# Allegro board core.brd
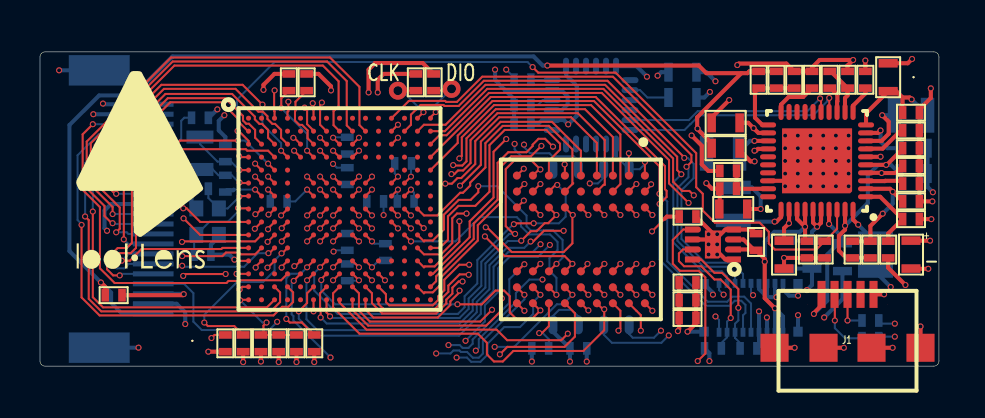
[diagram p0: board, top side]
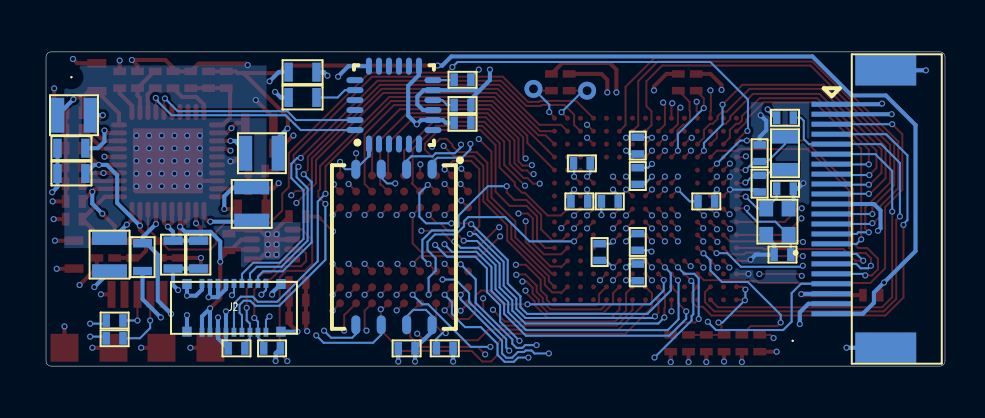
[diagram p1: board, bottom side, seen from below]

Outline 44.96 x 15.75 mm; copper layers: TOP, GND, SIG1, SIG2, POWER, BOTTOM. Coordinates in mm from the lower left corner of the outline.
Outline path: 0,15.49 arc(0.07,15.67) 0.25,15.75 44.7,15.75 arc(44.88,15.67) 44.96,15.49 44.96,0.25 arc(44.88,0.07) 44.7,0 0.25,0 arc(0.07,0.07) 0,0.25 0,15.49

## Design rules (mm)
net group 2.5V: nets N93770 N94238
net group N108220: nets N108220 N209430
net group N108232: nets N108232 N209434
net group N209616: nets N76608 N209616
net group OSC32-IN: nets OSC32-IN OSC32-OUT
net group 5V: nets N92103
net group CONNECT: nets N209454 N209458 N209478 N209482 N209502 N209506 N209628 N209640
net group POWER: nets N87122
net group RAM_CTL: nets N192988 N192990 N192992 N192994 N192996 N192998 N193000 N193002 N193004

## Placement (name value [footprint] x y rotation side)
C1  1uF  [0402]  12.83 1.14 90 top
C2  0.1uF  [0402]  11.94 1.14 90 top
C3  20pF  [0402]  8.13 5.59 0 bottom
C4  20pF  [0402]  8 8.89 180 bottom
C5  12pF  [0402]  9.27 9.14 90 bottom
C6  12pF  [0402]  9.27 10.67 90 bottom
C7  0.1uF  [0402]  18.16 10.16 0 bottom
C8  0.1uF  [0402]  17.27 5.71 270 bottom
C9  0.1uF  [0402]  18.29 8.26 0 bottom
C10  0.1uF  [0402]  15.37 11.05 90 bottom
C11  0.1uF  [0402]  15.37 4.7 270 bottom
C12  0.1uF  [0402]  11.94 8.26 180 bottom
C13  0.1uF  [0402]  15.37 6.22 270 bottom
C14  0.1uF  [0402]  16.76 8.26 0 bottom
C15  4.7uF  [0603]  32.13 13.46 0 bottom
C16  0.1uF  [0402]  24.13 12.19 0 bottom
C17  4.7uF  [0603]  32.13 14.73 0 bottom
C18  0.1uF  [0402]  24.13 13.08 0 bottom
C19  4.7uF  [0603]  38.61 5.59 270 bottom
C20  4.7pF  [0402]  40.64 5.84 270 top
C21  4.7uF  [0603]  43.69 9.65 180 bottom
C22  4.7uF  [0603]  37.21 5.59 270 top
C23  4.7uF  [0603]  34.67 7.87 0 top
C24  4.7uF  [0603]  34.29 12.19 180 top
C25  0.1uF  [0402]  38.61 14.35 270 top
C26  33pF  [0402]  36.83 14.35 90 top
C27  4.7uF  [0603]  34.29 10.92 180 top
C28  1uF  [0402]  43.56 10.92 180 top
C29  4.7uF  [0603]  43.69 10.92 0 bottom
C30  4.7uF  [0603]  42.42 14.48 270 top
C31  2.2uF  [0603]  40.13 5.46 270 bottom
C32  4.7uF  [0603]  37.34 5.59 270 bottom
C33  1uF  [0402]  38.35 5.84 90 top
C34  0.1uF  [0402]  39.24 5.84 270 top
C35  1uF  [0402]  43.56 9.14 0 top
C36  0.1uF  [0402]  35.81 6.22 90 top
C37  0.1uF  [0402]  42.42 5.84 90 top
C38  0.1uF  [0402]  43.56 11.81 180 top
C39  0.1uF  [0402]  26.92 0.89 180 bottom
C40  0.1uF  [0402]  32.38 7.49 180 top
C41  0.1uF  [0402]  32.38 3.3 180 top
C42  0.1uF  [0402]  32.38 2.41 180 top
C43  0.1uF  [0402]  32.38 4.19 180 top
C46  0.1uF  [0402]  15.37 9.53 90 bottom
D1  LED  [0603]  43.56 5.59 90 top
F1  -  [FPC-22]  5.66 13.12 270 bottom
J1  -  [MICRO-USB]  40.39 0.92 0 top
J2  CONN RECT 11x2  [MOLEX-BTB-18P-B]  35.56 2.92 180 bottom
L1  100nH  [0402]  11.05 1.14 90 top
L2  2.2uH  [0806]  41.78 5.59 270 bottom
L3  2.2uH  [0806]  34.67 8.13 90 bottom
L4  2.2uH  [0806]  34.16 10.67 180 bottom
L5  2.2uH  [0806]  43.56 12.57 0 bottom
M1  MTG  [MTG-100]  7.62 1.27 0 top
M2  MTG  [MTG-100]  43.69 14.48 0 top
NOREF  -  []  43.69 14.48 0 top
NOREF#2  -  []  0 0.64 0 top
NOREF#3  -  []  36.94 -1.23 0 top
NOREF#4  -  []  0 1.04 0 top
NOREF#5  -  []  1.28 4.29 0 top
NOREF#6  -  []  0.16 0.12 90 top
NOREF#7  -  []  0.3 0 90 top
NOREF#8  -  []  7.62 0 90 top
NOREF#9  -  []  36.12 0 90 top
NOREF#10  -  []  43.69 14.48 90 top
NOREF#11  -  []  35.56 2.92 0 top
O1  25M  [OSC-2016]  8.38 7.24 0 bottom
O2  32.768K  [OSC-2012]  8 10.67 90 bottom
R1  10K  [0402]  35.43 0.89 180 bottom
R2  10K  [0402]  33.66 0.89 0 bottom
R3  10K  [0402]  12.45 14.22 270 top
R4  10K  [0402]  13.72 1.14 90 top
R5  10K  [0402]  13.34 14.22 270 top
R6  10K  [0402]  9.27 1.14 270 top
R7  10K  [0402]  10.16 1.14 90 top
R8  10K  [0402]  19.68 14.22 90 top
R9  10K  [0402]  18.8 14.22 90 top
R10  1K  [0402]  24.13 14.35 180 bottom
R11  160K  [0402]  41.53 5.84 270 top
R12  30K  [0402]  43.56 8.26 0 top
R13  470K  [0402]  34.42 9.78 180 top
R14  150K  [0402]  34.42 8.89 180 top
R15  470K  [0402]  35.94 14.35 90 top
R16  220K  [0402]  37.72 14.35 90 top
R17  22  [0402]  41.53 1.4 0 bottom
R18  22  [0402]  41.53 2.29 0 bottom
R19  10  [0402]  43.56 10.03 180 top
R20  220K  [0402]  43.56 12.7 0 top
R22  1.5K  [0402]  41.27 14.35 270 top
R23  100K  [0402]  40.39 14.35 90 top
R24  100K  [0402]  39.5 14.35 90 top
R25  10K  [0402]  43.56 7.37 0 top
R26  10K  [0402]  8 12.45 0 bottom
R27  10K  [0402]  3.68 3.56 180 top
R28  10K  [0402]  25.02 0.89 0 bottom
U1  STM32F429  [STM32F429-UFBGA176]  14.98 7.87 0 top
U2  MPU6050  [MPU6050-QFN]  27.56 13.08 90 bottom
U3  RT5002  [RT5002-QFN40]  38.86 10.29 180 top
U4  MAX17048  [MAX17048-TDFN8]  33.66 6.1 180 top
U5  MT48LC8M16A2  [MT48LC8M16A2-VFBGA54]  27.05 6.35 270 top
U6  W25Q256  [W25Q256-SON]  27.56 5.97 270 bottom

## Library data of the parts
C1 C28 C33 C35 = Cap: signal model: DEFAULT_CAPACITOR_1e+06pF_2_1
C2 C7-C14 C16 C18 C25 C34 C36-C43 = Cap: signal model: DEFAULT_CAPACITOR_100000pF_2_1
C3 C4 = Cap: signal model: DEFAULT_CAPACITOR_20.000000pF_2_1
C5 C6 = Cap: signal model: DEFAULT_CAPACITOR_12.000000pF_2_1
C15 C17 C19 C21-C24 C27 C29 C30 C32 = Cap: signal model: DEFAULT_CAPACITOR_4.7e+06pF_2_1
C20 = Cap: signal model: DEFAULT_CAPACITOR_4.700000pF_2_1
C26 = Cap: signal model: DEFAULT_CAPACITOR_33.000000pF_2_1
C31 = Cap: signal model: DEFAULT_CAPACITOR_2.2e+06pF_2_1
C46 = Cap
D1 = LED
F1 = FPC-22
J1 = MICRO-USB
J2 = CONN RECT 11x2
L1 = Inductor: signal model: DEFAULT_INDUCTOR_100.000000nH_2_1
L2-L5 = Inductor: signal model: DEFAULT_INDUCTOR_2200nH_2_1
M1 M2 = MTG
O1 = OSC-N
O2 = OSC-CLK: signal model: DEFAULT_RESISTOR_32768OHM_2_1
R1-R9 R25-R28 = Res: signal model: DEFAULT_RESISTOR_10000OHM_2_1
R10 = Res: signal model: DEFAULT_RESISTOR_1000.000000OHM_2_1
R11 = Res: signal model: DEFAULT_RESISTOR_160000OHM_2_1
R12 = Res: signal model: DEFAULT_RESISTOR_30000OHM_2_1
R13 R15 = Res: signal model: DEFAULT_RESISTOR_470000OHM_2_1
R14 = Res: signal model: DEFAULT_RESISTOR_150000OHM_2_1
R16 R20 = Res: signal model: DEFAULT_RESISTOR_220000OHM_2_1
R17 R18 = Res: signal model: DEFAULT_RESISTOR_22.000000OHM_2_1
R19 = Res: signal model: DEFAULT_RESISTOR_10.000000OHM_2_1
R22 = Res: signal model: DEFAULT_RESISTOR_1500OHM_2_1
R23 R24 = Res: signal model: DEFAULT_RESISTOR_100000OHM_2_1
U1 = STM32F429
U2 = MPU6050
U3 = RT5002
U4 = MAX17048
U5 = MT48LC8M16A2
U6 = W25Q256

## Footprints (pads in the part's own frame, mm; a bottom-side part is the same pattern mirrored in y, then rotated)
0402
  rect 0.375x0.64 smd: 1(-0.42,0) 2(0.42,0)
0603
  rect 0.425x0.95 smd: 1(-0.7,0) 2(0.7,0)
0806
  rect 0.675x1.75 smd: 1(-0.825,0) 2(0.825,0)
FPC-22
  rect 0.254x2.032 smd: 1(0,0) 2(0.5,0) 3(1,0) 4(1.5,0) 5(2,0) 6(2.5,0) 7(3,0) 8(3.5,0) 9(4,0) 10(4.5,0) 11(5,0) 12(5.5,0) 13(6,0) 14(6.5,0) 15(7,0) 16(7.5,0) 17(8,0) 18(8.5,0) 19(9,0) 20(9.5,0) 21(10,0) 22(10.5,0)
  rect 1.524x3.048 smd: 23(-1.7,2.7) 24(12.2,2.7)
MAX17048-TDFN8
  custom 0.8x0.3 smd: 1(-1,0.75) 2(-1,0.25) 3(-1,-0.25) 4(-1,-0.75) 5(1,-0.75) 6(1,-0.25) 7(1,0.25) 8(1,0.75)
  custom 0.8x1.4 smd: 9(0,0)
MICRO-USB
  round 0.01 hole 0.5 unplated: (-2,2.15) (2,2.15)
  rect 0.4x1.35 smd: 1(-1.3,2.675) 2(-0.65,2.675) 3(0,2.675) 4(0.65,2.675) 5(1.3,2.675)
  rect 1.4x1.4 smd: 6(-3.65,0) 7(-1.2,0) 8(1.2,0) 9(3.65,0)
MOLEX-BTB-18P-B
  rect 0.24x0.45 smd: 1(-1.6,-1.225) 2(-1.6,1.225) 3(-1.2,-1.225) 4(-1.2,1.225) 5(-0.8,-1.225) 6(-0.8,1.225) 7(-0.4,-1.225) 8(-0.4,1.225) 9(0,-1.225) 10(0,1.225) 11(0.4,-1.225) 12(0.4,1.225) 13(0.8,-1.225) 14(0.8,1.225) 15(1.2,-1.225) 16(1.2,1.225) 17(1.6,-1.225) 18(1.6,1.225)
  rect 0.47x0.5 smd: 19(-2.35,-1.195) 20(-2.35,1.195) 21(2.35,-1.195) 22(2.35,1.195)
MPU6050-QFN
  oval 0.85x0.3 smd: 1(-1.95,1.25) 2(-1.95,0.75) 3(-1.95,0.25) 4(-1.95,-0.25) 5(-1.95,-0.75) 6(-1.95,-1.25) 13(1.95,-1.25) 14(1.95,-0.75) 15(1.95,-0.25) 16(1.95,0.25) 17(1.95,0.75) 18(1.95,1.25)
  oval 0.3x0.85 smd: 7(-1.25,-1.95) 8(-0.75,-1.95) 9(-0.25,-1.95) 10(0.25,-1.95) 11(0.75,-1.95) 12(1.25,-1.95) 19(1.25,1.95) 20(0.75,1.95) 21(0.25,1.95) 22(-0.25,1.95) 23(-0.75,1.95) 24(-1.25,1.95)
MT48LC8M16A2-VFBGA54
  round 0.4 smd: A1(-3.2,3.2) A2(-2.4,3.2) A3(-1.6,3.2) A7(1.6,3.2) A8(2.4,3.2) A9(3.2,3.2) B1(-3.2,2.4) B2(-2.4,2.4) B3(-1.6,2.4) B7(1.6,2.4) B8(2.4,2.4) B9(3.2,2.4) C1(-3.2,1.6) C2(-2.4,1.6) C3(-1.6,1.6) C7(1.6,1.6) C8(2.4,1.6) C9(3.2,1.6) D1(-3.2,0.8) D2(-2.4,0.8) D3(-1.6,0.8) D7(1.6,0.8) D8(2.4,0.8) D9(3.2,0.8) E1(-3.2,0) E2(-2.4,0) E3(-1.6,0) E7(1.6,0) E8(2.4,0) E9(3.2,0) F1(-3.2,-0.8) F2(-2.4,-0.8) F3(-1.6,-0.8) F7(1.6,-0.8) F8(2.4,-0.8) F9(3.2,-0.8) G1(-3.2,-1.6) G2(-2.4,-1.6) G3(-1.6,-1.6) G7(1.6,-1.6) G8(2.4,-1.6) G9(3.2,-1.6) H1(-3.2,-2.4) H2(-2.4,-2.4) H3(-1.6,-2.4) H7(1.6,-2.4) H8(2.4,-2.4) H9(3.2,-2.4) J1(-3.2,-3.2) J2(-2.4,-3.2) J3(-1.6,-3.2) J7(1.6,-3.2) J8(2.4,-3.2) J9(3.2,-3.2)
MTG-100
  round 0.1 hole 1 unplated: (0,0)
OSC-2012
  rect 0.65x1.35 smd: 1(-0.812,0) 2(0.812,0)
OSC-2016
  rect 0.7x0.8 smd: 1(-0.563,0.663) 2(-0.563,-0.663) 3(0.563,-0.663) 4(0.563,0.663)
RT5002-QFN40
  oval 0.8x0.25 smd: 1(-2.45,1.8) 2(-2.45,1.4) 3(-2.45,1) 4(-2.45,0.6) 5(-2.45,0.2) 6(-2.45,-0.2) 7(-2.45,-0.6) 8(-2.45,-1) 9(-2.45,-1.4) 10(-2.45,-1.8) 21(2.45,-1.8) 22(2.45,-1.4) 23(2.45,-1) 24(2.45,-0.6) 25(2.45,-0.2) 26(2.45,0.2) 27(2.45,0.6) 28(2.45,1) 29(2.45,1.4) 30(2.45,1.8)
  oval 0.25x0.8 smd: 11(-1.8,-2.45) 12(-1.4,-2.45) 13(-1,-2.45) 14(-0.6,-2.45) 15(-0.2,-2.45) 16(0.2,-2.45) 17(0.6,-2.45) 18(1,-2.45) 19(1.4,-2.45) 20(1.8,-2.45) 31(1.8,2.45) 32(1.4,2.45) 33(1,2.45) 34(0.6,2.45) 35(0.2,2.45) 36(-0.2,2.45) 37(-0.6,2.45) 38(-1,2.45) 39(-1.4,2.45) 40(-1.8,2.45)
  custom 3.5x3.25 smd: 41(0,0)
STM32F429-UFBGA176
  round 0.25 smd: A1(-4.55,4.55) A2(-3.9,4.55) A3(-3.25,4.55) A4(-2.6,4.55) A5(-1.95,4.55) A6(-1.3,4.55) A7(-0.65,4.55) A8(0,4.55) A9(0.65,4.55) A10(1.3,4.55) A11(1.95,4.55) A12(2.6,4.55) A13(3.25,4.55) A14(3.9,4.55) A15(4.55,4.55) B1(-4.55,3.9) B2(-3.9,3.9) B3(-3.25,3.9) B4(-2.6,3.9) B5(-1.95,3.9) B6(-1.3,3.9) B7(-0.65,3.9) B8(0,3.9) B9(0.65,3.9) B10(1.3,3.9) B11(1.95,3.9) B12(2.6,3.9) B13(3.25,3.9) B14(3.9,3.9) B15(4.55,3.9) C1(-4.55,3.25) C2(-3.9,3.25) C3(-3.25,3.25) C4(-2.6,3.25) C5(-1.95,3.25) C6(-1.3,3.25) C7(-0.65,3.25) C8(0,3.25) C9(0.65,3.25) C10(1.3,3.25) C11(1.95,3.25) C12(2.6,3.25) C13(3.25,3.25) C14(3.9,3.25) C15(4.55,3.25) D1(-4.55,2.6) D2(-3.9,2.6) D3(-3.25,2.6) D4(-2.6,2.6) D5(-1.95,2.6) D6(-1.3,2.6) D7(-0.65,2.6) D8(0,2.6) D9(0.65,2.6) D10(1.3,2.6) D11(1.95,2.6) D12(2.6,2.6) D13(3.25,2.6) D14(3.9,2.6) D15(4.55,2.6) E1(-4.55,1.95) E2(-3.9,1.95) E3(-3.25,1.95) E4(-2.6,1.95) E12(2.6,1.95) E13(3.25,1.95) E14(3.9,1.95) E15(4.55,1.95) F1(-4.55,1.3) F2(-3.9,1.3) F3(-3.25,1.3) F4(-2.6,1.3) F6(-1.3,1.3) F7(-0.65,1.3) F8(0,1.3) F9(0.65,1.3) F10(1.3,1.3) F12(2.6,1.3) F13(3.25,1.3) F14(3.9,1.3) F15(4.55,1.3) G1(-4.55,0.65) G2(-3.9,0.65) G3(-3.25,0.65) G4(-2.6,0.65) G6(-1.3,0.65) G7(-0.65,0.65) G8(0,0.65) G9(0.65,0.65) G10(1.3,0.65) G12(2.6,0.65) G13(3.25,0.65) G14(3.9,0.65) G15(4.55,0.65) H1(-4.55,0) H2(-3.9,0) H3(-3.25,0) H4(-2.6,0) H6(-1.3,0) H7(-0.65,0) H8(0,0) H9(0.65,0) H10(1.3,0) H12(2.6,0) H13(3.25,0) H14(3.9,0) H15(4.55,0) J1(-4.55,-0.65) J2(-3.9,-0.65) J3(-3.25,-0.65) J4(-2.6,-0.65) J6(-1.3,-0.65) J7(-0.65,-0.65) J8(0,-0.65) J9(0.65,-0.65) J10(1.3,-0.65) J12(2.6,-0.65) J13(3.25,-0.65) J14(3.9,-0.65) J15(4.55,-0.65) K1(-4.55,-1.3) K2(-3.9,-1.3) K3(-3.25,-1.3) K4(-2.6,-1.3) K6(-1.3,-1.3) K7(-0.65,-1.3) K8(0,-1.3) K9(0.65,-1.3) K10(1.3,-1.3) K12(2.6,-1.3) K13(3.25,-1.3) K14(3.9,-1.3) K15(4.55,-1.3) L1(-4.55,-1.95) L2(-3.9,-1.95) L3(-3.25,-1.95) L4(-2.6,-1.95) L12(2.6,-1.95) L13(3.25,-1.95) L14(3.9,-1.95) L15(4.55,-1.95) M1(-4.55,-2.6) M2(-3.9,-2.6) M3(-3.25,-2.6) M4(-2.6,-2.6) M5(-1.95,-2.6) M6(-1.3,-2.6) M7(-0.65,-2.6) M8(0,-2.6) M9(0.65,-2.6) M10(1.3,-2.6) M11(1.95,-2.6) M12(2.6,-2.6) M13(3.25,-2.6) M14(3.9,-2.6) M15(4.55,-2.6) N1(-4.55,-3.25) N2(-3.9,-3.25) N3(-3.25,-3.25) N4(-2.6,-3.25) N5(-1.95,-3.25) N6(-1.3,-3.25) N7(-0.65,-3.25) N8(0,-3.25) N9(0.65,-3.25) N10(1.3,-3.25) N11(1.95,-3.25) N12(2.6,-3.25) N13(3.25,-3.25) N14(3.9,-3.25) N15(4.55,-3.25) P1(-4.55,-3.9) P2(-3.9,-3.9) P3(-3.25,-3.9) P4(-2.6,-3.9) P5(-1.95,-3.9) P6(-1.3,-3.9) P7(-0.65,-3.9) P8(0,-3.9) P9(0.65,-3.9) P10(1.3,-3.9) P11(1.95,-3.9) P12(2.6,-3.9) P13(3.25,-3.9) P14(3.9,-3.9) P15(4.55,-3.9) R1(-4.55,-4.55) R2(-3.9,-4.55) R3(-3.25,-4.55) R4(-2.6,-4.55) R5(-1.95,-4.55) R6(-1.3,-4.55) R7(-0.65,-4.55) R8(0,-4.55) R9(0.65,-4.55) R10(1.3,-4.55) R11(1.95,-4.55) R12(2.6,-4.55) R13(3.25,-4.55) R14(3.9,-4.55) R15(4.55,-4.55)
W25Q256-SON
  oval 0.95x0.45 smd: 1(-3.9,1.905) 2(-3.9,0.635) 3(-3.9,-0.635) 4(-3.9,-1.905) 5(3.9,-1.905) 6(3.9,-0.635) 7(3.9,0.635) 8(3.9,1.905)

## Nets
2.5V: C26.2 C27.2 F1.22 L4.2 R15.2 R27.2
3.3V: C9.2 C10.2 C11.2 C12.2 C13.2 C14.2 C16.2 C17.1 C23.2 C39.2 C40.2 C41.2 C42.2 C43.2 C46.2 J2.5 J2.7 L1.1 L3.2 R1.1 R2.1 R5.1 R6.2 R8.2 R13.2 R25.2 R26.2 R28.1 U1.C5(VDD1) U1.C7(VDD2) U1.C8(VDD3) U1.C9(VDD4) U1.F3(VDD5) U1.G3(VDD6) U1.G13(VDD7) U1.H13(VDD8) U1.J12(VDD9) U1.J13(VDD10) U1.K4(VDD11) U1.N8(VDD12) U1.N9(VDD13) U1.N10(VDD14) U2.8(VLOGIC) U2.13(VDD) U5.A7(VDDQ1) U5.A9(VDD1) U5.B3(VDDQ2) U5.C7(VDDQ3) U5.D3(VDDQ4) U5.E7(VDD2) U5.J9(VDD3) U6.3(W\P\) U6.7(R\S\T\) U6.8(VCC)
5V: C20.2 C21.2 C28.2 F1.1 F1.11 R11.2 U3.5(PVD7) U3.39(PVD1)
GND: C1.1 C2.1 C3.2 C4.2 C5.1 C6.2 C7.1 C8.1 C9.1 C10.1 C11.1 C12.1 C13.1 C14.1 C15.2 C16.1 C17.2 C18.1 C19.2 C21.1 C22.2 C23.1 C24.2 C25.1 C27.1 C28.1 C29.2 C30.1 C31.2 C32.2 C33.1 C34.2 C35.2 C36.2 C37.1 C38.1 C39.1 C40.1 C41.1 C42.1 C43.1 C46.1 F1.2 F1.21 F1.23 F1.24 J1.5(GND) J1.6(SH1) J1.7(SH2) J1.8(SH3) J1.9(SH4) J2.2 J2.4 J2.6 J2.8 J2.19 J2.20 J2.21 J2.22 O1.2(GND1) O1.4(GND2) R3.1 R4.1 R7.1 R9.2 R12.2 R14.2 R16.2 R19.1 R20.2 R22.1 R23.2 U1.D5(VSS1) U1.D7(VSS2) U1.D8(VSS3) U1.D9(VSS4) U1.F2(VSS5) U1.F6(VSS6) U1.F7(VSS7) U1.F8(VSS8) U1.F9(VSS9) U1.F10(VSS10) U1.F12(VSS11) U1.G2(VSS12) U1.G6(VSS13) U1.G7(VSS14) U1.G8(VSS15) U1.G9(VSS16) U1.G10(VSS17) U1.G12(VSS18) U1.H6(VSS19) U1.H7(VSS20) U1.H8(VSS21) U1.H9(VSS22) U1.H10(VSS23) U1.H12(VSS24) U1.J6(VSS25) U1.J7(VSS26) U1.J8(VSS27) U1.J9(VSS28) U1.J10(VSS29) U1.K6(VSS30) U1.K7(VSS31) U1.K8(VSS32) U1.K9(VSS33) U1.K10(VSS34) U1.M1(VSSA) U1.M8(VSS35) U1.M9(VSS36) U1.N1(VREF-) U2.1(CLKIN) U2.9(AO0) U2.11(FSYNC) U2.18(GND) U3.28(TSSEL) U3.41(GND) U4.1(CTG) U4.4(GND) U4.6(QSTRT) U4.9(GND-PAD) U5.A1(VSS1) U5.A3(VSSQ1) U5.B7(VSSQ2) U5.C3(VSSQ3) U5.D7(VSSQ4) U5.E3(VSS2) U5.J1(VSS3) U6.4(GND)
VBAT: C33.2 C36.1 J2.1 J2.3 U3.33(BAT2) U3.34(BAT1) U4.2(CELL) U4.3(VDD)
VDDA: C1.2 C2.2 L1.2 U1.P1(VREF+) U1.R1(VDDA)
BOOT0: R3.2 U1.D6(BOOT0)
BOOT1: R4.2 U1.M6(PB2(BOOT1))
BYPASS: R7.2 U1.L4(BYPASS_REG)
FMC_A0: U1.E2(PF0) U5.H7(A0)
FMC_A1: U1.H3(PF1) U5.H8(A1)
FMC_A2: U1.H2(PF2) U5.J8(A2)
FMC_A3: U1.J2(PF3) U5.J7(A3)
FMC_A4: U1.J3(PF4) U5.J3(A4)
FMC_A5: U1.K3(PF5) U5.J2(A5)
FMC_A6: U1.P6(PF12) U5.H3(A6)
FMC_A7: U1.N6(PF13) U5.H2(A7)
FMC_A8: U1.R7(PF14) U5.H1(A8)
FMC_A9: U1.P7(PF15) U5.G3(A9)
FMC_A10: U1.N7(PG0) U5.H9(A10)
FMC_A11: U1.M7(PG1) U5.G2(A11)
FMC_A12: U1.L15(PG2) U5.G1(NC/A12)
FMC_D0: U1.M14(PD14) U5.A8(DQ0)
FMC_D1: U1.L14(PD15) U5.B9(DQ1)
FMC_D2: U1.B12(PD0) U5.B8(DQ2)
FMC_D3: U1.C12(PD1) U5.C9(DQ3)
FMC_D4: U1.R8(PE7) U5.C8(DQ4)
FMC_D5: U1.P8(PE8) U5.D9(DQ5)
FMC_D6: U1.P9(PE9) U5.D8(DQ6)
FMC_D7: U1.R9(PE10) U5.E9(DQ7)
FMC_D8: U1.P10(PE11) U5.E1(DQ8)
FMC_D9: U1.R10(PE12) U5.D2(DQ9)
FMC_D10: U1.N11(PE13) U5.D1(DQ10)
FMC_D11: U1.P11(PE14) U5.C2(DQ11)
FMC_D12: U1.R11(PE15) U5.C1(DQ12)
FMC_D13: U1.P15(PD8) U5.B2(DQ13)
FMC_D14: U1.P14(PD9) U5.B1(DQ14)
FMC_D15: U1.N15(PD10) U5.A2(DQ15)
LCD_B0: F1.15 U1.B1(PE4)
LCD_B1: F1.14 U1.B8(PG12)
LCD_B2: F1.13 U1.B10(PG10)
LCD_B3: F1.12 U1.B9(PG11)
LCD_B4: F1.10 U1.D4(PI4)
LCD_B5: F1.9 U1.C4(PI5)
LCD_B6: F1.8 U1.C3(PI6)
LCD_B7: F1.7 U1.C2(PI7)
OSC32-IN: C6.1 O2.2(X2) U1.E1(PC14(OSC32_IN))
OSC32-OUT: C5.2 O2.1(X1) U1.F1(PC15(OSC32_OUT))
OSC-IN: C4.1 O1.3(X2) U1.G1(PH0(OSC_IN))
OSC-OUT: C3.1 O1.1(X1) U1.H1(PH1(OSC_OUT)
PDR_ON: R5.2 U1.C6(PDR_ON)
RESET: R6.1 U1.J1(NRST)
SWCLK: R9.1 U1.A14(PA14(TCK))
SWDIO: R8.1 U1.A15(PA13(TMS))
SYS: C19.1 C22.1 C24.1 C29.1 C32.1 L2.2 U3.9(PVD4) U3.22(PVD3) U3.24(EN1234) U3.32(PVD2) U3.35(SYS2) U3.36(SYS1)
VCAP_1: C8.2 U1.M10(VCAP_1)
VCAP_2: C7.2 U1.F13(VCAP_2)
VCHG: C31.1 J1.1(VBUS) U3.37(VIN)
VRTC: C34.1 U1.C1(VBAT) U3.38(RTCPWR)
N58225: F1.20 R27.1
N76608: R10.1 U2.12(INT)
N76702: C18.2 U2.10(REGOUT)
N76822: C15.1 U2.20(CPOUT)
N84564: C25.2 U3.20(VREF)
N85062: D1.2(ANODE) U3.6(LX7)
N85526: D1.1(CATHODE) R19.2 U3.4(FB7)
N85983: R22.2 U3.11(ISETA)
N86193: R24.1 U3.13(VP)
N86197: R23.1 R24.2 U3.12(TS)
N86348: C37.2 R25.1 U3.1(I\N\T\)
N86681: C38.2 U3.7(BATS)
N87122: L2.1 U3.40(LX1)
N92103: C20.1 R11.1 R12.1 U3.2(FB1)
N92575: L3.1 U3.31(LX2)
N92645: R13.1 R14.1 U3.29(FB2)
N93770: C26.1 R15.1 R16.1 U3.21(FB3)
N94238: L4.1 U3.23(LX3)
N94612: C30.2 L5.2 R20.1 U3.10(FB4)
N94775: L5.1 U3.8(LX4)
N95538: C35.1 U3.3(VDDM)
N108220: J1.2(D-) R17.1
N108232: J1.3(D+) R18.1
N192986: R28.2 U1.B6(PB6) U5.G9(C\S\)
N192988: U1.M2(PC0) U5.F9(W\E\)
N192990: U1.B7(PG15) U5.F7(C\A\S\)
N192992: U1.R6(PF11) U5.F8(R\A\S\)
N192994: U1.A6(PB5) U5.F3(CKE)
N192996: U1.H14(PG8) U5.F2(CLK)
N192998: U1.A4(PE0) U5.E8(DQML)
N193000: U1.A3(PE1) U5.F1(DQMH)
N193002: U1.K14(PG4) U5.G7(BA0)
N193004: U1.K13(PG5) U5.G8(BA1)
N193010: U1.K1(PF7) U6.6(CLK)
N206144: U1.K2(PF6) U6.1(C\S\)
N206148: U1.L3(PF8) U6.2(DO)
N206152: U1.L2(PF9) U6.5(DI)
N209400: J2.13 R1.2 U1.J4(PH5) U2.24(SDA) U3.14(SDA) U4.8(SDA)
N209412: J2.15 R2.2 U1.H4(PH4) U2.23(SCL) U3.15(SCL) U4.7(SCL)
N209430: R17.2 U1.C15(PA11)
N209434: R18.2 U1.B15(PA12)
N209454: J2.9 U1.E15(PA9)
N209458: J2.11 U1.D15(PA10)
N209478: J2.10 U1.D1(PC13)
N209482: J2.16 U1.B14(PC10)
N209502: J2.12 U1.B13(PC11)
N209506: J2.14 U1.A12(PC12)
N209526: F1.19 U1.J14(PG7)
N209530: F1.17 U1.D3(PI9)
N209550: F1.18 U1.E3(PI10)
N209554: F1.16 U1.L1(PF10)
N209574: F1.3 U1.N4(PA4)
N209578: F1.4 U1.P4(PA5)
N209598: F1.5 R26.1 U1.P3(PA6)
N209602: F1.6 U1.R3(PA7)
N209616: R10.2 U1.M5(PC3)
N209628: J2.17 U1.M3(PC1)
N209640: J2.18 U1.M4(PC2)
N219356: U1.N5(PC4) U4.5(A\L\R\T\)

Pads without a net: J1 4; U1 A1 A2 A5 A7 A8 A9 A10 A11 A13 B2 B3 B4 B5 B11 C10 C11 C13 C14 D2 D10 D11 D12 D13 D14 E4 E12 E13 E14 F4 F14 F15 G4 G14 G15 H15 J15 K12 K15 L12 L13 M11 M12 M13 M15 N2 N3 N12 N13 N14 P2 P5 P12 P13 R2 R4 R5 R12 R13 R14 R15; U2 2 3 4 5 6 7 14 15 16 17 19 21 22; U3 16 17 18 19 25 26 27 30; U5 E2

## Via types
v1: diameter 0.305, hole 0.203, TOP to BOTTOM, 368 vias
v2: diameter 0.9, hole 0.45, TOP to BOTTOM, 2 vias

## Routing (per net, layer and track width the routed paths; a pad name or vN(x,y) marks a point on that pad's centre or on a via; arc(x,y) is an arc through that point)
2.5V: length 56.4
  TOP w0.203: C26.2 R15.2 35.47,14.77 35.38,14.68 35.08,14.68 ; 35.08,14.68 32.87,12.47 32.87,11.91 ; 35.08,14.68 33.32,14.68 32.94,15.06 v1(25.37,15.06) ; R27.2 3.26,3.98 v1(3.05,4.19) ; v1(32.88,11.91) 32.87,11.91 ; 32.87,11.91 32.87,11.89 33.59,11.16 C27.2
  BOTTOM w0.203: L4.2 33.34,11.45 v1(32.88,11.91) ; v1(25.37,15.06) 25.14,15.06 24.68,15.52 6.63,15.52 4.67,13.56 2.96,13.56 1.47,12.08 1.47,5.77 v1(3.05,4.19) 3.56,3.68 3.56,3.17 4.11,2.62 F1.22
3.3V: length 50.4
  TOP w0.102: U1.N9 v1(15.95,4.3) ; U1.G13 v1(18.55,8.85) ; U1.C7 v1(14.01,11.45) ; U1.C5 12.71,11.44 v1(12.67,11.44) ; U1.K4 12.09,6.28 v1(12.09,6.25) ; U5.B3 v1(29.83,7.58) ; U5.C7 v1(29.03,5.12) ; U5.A7 v1(30.63,5.12) ; U5.A9 v1(30.63,2.78) ; U1.N10 v1(16.6,4.3) ; U1.C9 v1(15.95,11.45) ; U1.C8 v1(14.66,11.45) ; v1(30.61,6.75) 31.24,7.39 ; U1.F3 v1(11.41,9.5) ; U1.G3 v1(11.41,8.85) ; U1.J12 v1(17.9,6.9) ; U1.N8 v1(14.66,4.3) ; U5.J9 v1(24.23,2.78) ; v1(27.38,5.12) 27.38,5.08 U5.E7 ; U1.J13 v1(18.55,6.9) ; U5.D3 v1(28.23,7.58) ; U1.H13 v1(18.55,7.55)
  TOP w0.203: R8.2 19.14,15.19 16.76,15.19 16.43,14.86 v1(16.43,13.72) ; R6.2 v1(8.42,0.72) ; L1.1 v1(11.05,0.23) ; C40.2 31.35,7.49 31.24,7.39 ; R13.2 33.43,9.78 33.1,10.11 33.1,11.05 v1(32.59,11.56) ; C43.2 C41.2 C42.2 31.97,1.87 31.9,1.8 v1(31.9,1.75) ; v1(14.55,13.82) 14.55,14.02 13.93,14.64 R5.1 ; C23.2 v1(36.04,7.87) ; R25.2 v1(44.58,7.37)
  BOTTOM w0.102: C9.2 18.71,8.69 v1(18.55,8.85) ; 26.92,2.13 26.92,2.49 26.59,2.82 25.96,2.82 25.65,2.51 25.65,2.13 ; C14.2 v1(17.18,7.57) ; U6.3 28.19,9.45 27.9,9.16 v1(27.5,9.16) ; C13.2 14.74,5.8 v1(14.68,5.74) ; 28.19,7.61 v1(28.23,7.58) ; C11.2 15.93,4.28 v1(15.95,4.3) ; C46.2 14.85,9.94 v1(14.66,10.13) ; v1(11.41,8.85) 11.52,8.74 C12.2 ; C10.2 14.68,11.47 v1(14.66,11.45)
  BOTTOM w0.203: L3.2 35.6,8.95 36.04,8.51 v1(36.04,7.87) ; U2.13 26.31,14.59 26.85,14.05 26.85,12.55 v1(26.42,12.12) 26.2,12.33 U2.8 25.11,12.33 24.97,12.19 C16.2 ; R28.1 v1(24.6,0.23) 24.65,0.28 ; v1(26.5,0.23) C39.2 26.05,1.35 26.04,1.35 25.65,1.73 U6.8 25.65,2.13 ; v1(33.48,0.25) 33.48,0.65 R2.1 ; R26.2 8.45,12.45 v1(8.87,12.87) ; C17.1 31.06,14.73 v1(30.89,14.55) ; R1.1 35.96,1 ; 35.96,1 J2.7 v1(35.96,2.74) ; 35.96,1 36.36,1.4 J2.5 36.36,2.43 v1(36.35,2.44) ; 26.92,2.13 U6.7
5V: length 68.2
  TOP w0.203: R11.2 C20.2 40.32,5.42 39.95,5.79 39.95,6.53 40.26,6.84 v1(40.26,7.04) U3.39 ; U3.5 42.31,10.09 v1(42.32,10.08) 42.34,10.08 43.14,10.88 C28.2
  SIG1 w0.203: v1(42.32,10.08) 41.73,10.08 41.27,10.54 41.27,14.1 39.88,15.49 5.49,15.49 v1(3.15,13.16) 3.15,6.99 v1(3.35,6.78)
  BOTTOM w0.203: v1(40.26,7.04) 41.4,8.18 41.4,9.57 41.92,10.08 v1(42.32,10.08) 42.56,10.08 C21.2 ; F1.11 3.55,8.12 3.23,7.8 3.23,6.91 v1(3.35,6.78) ; F1.1 3.18,13.12 v1(3.15,13.16)
GND: length 121.5
  TOP w0.102: U1.F9 v1(15.95,9.5) ; U1.G8 v1(14.66,8.85) ; U1.D9 v1(15.95,10.8) ; U1.N1 9.83,4.62 v1(9.83,4.62) ; U1.G2 v1(10.76,8.85) ; v1(30.25,10.24) 30.25,9.74 30.25,9.74 U5.A1 ; U1.H8 v1(14.66,7.55) ; U1.F12 v1(17.9,9.5) ; U1.G10 v1(16.6,8.85) ; U1.J8 v1(14.66,6.9) ; U1.J7 v1(14.01,6.9) ; U1.F7 v1(14.01,9.5) ; U1.H9 v1(15.95,7.55) ; U1.J6 v1(13.36,6.9) ; U1.G12 v1(17.9,8.85) ; U1.J10 v1(16.6,6.9) ; U5.B7 v1(29.83,5.12) ; U1.D7 v1(14.01,10.8) ; U1.J9 v1(15.95,6.9) ; U1.H7 v1(14.01,7.55) ; U1.F8 v1(14.66,9.5) ; U1.K9 v1(15.95,6.25) ; U5.D7 v1(28.23,5.12) ; U1.F2 v1(10.76,9.5) ; v1(24.19,9.89) U5.J1 ; U1.F6 v1(13.36,9.5) ; U1.M9 v1(15.95,4.95) ; U1.G6 v1(13.36,8.85) ; U5.E3 v1(27.43,7.58) ; v1(9.72,5.34) 9.78,5.27 U1.M1 ; U1.K6 v1(13.36,6.25) ; U5.A3 v1(30.63,7.58) ; U1.H12 v1(17.9,7.55) ; U1.G9 v1(15.95,8.85) ; U1.K10 v1(16.6,6.25) ; U1.D5 v1(12.71,10.8) ; U1.K8 v1(14.66,6.25) ; U1.D8 v1(14.66,10.8) ; U1.M8 v1(14.66,4.95) ; U5.C3 v1(29.03,7.58) ; U1.G7 v1(14.01,8.85) ; U1.H10 v1(16.6,7.55) ; U1.K7 v1(14.01,6.25) ; U1.H6 v1(13.36,7.55) ; U1.F10 v1(16.6,9.5)
  TOP w0.203: v1(11.18,13.84) 11.18,14.1 11.72,14.64 R3.1 ; v1(44.63,8.26) R12.2 C35.2 R19.1 C28.1 C38.1 R20.2 43.98,12.87 44.55,13.44 v1(44.55,13.92) ; v1(33.32,9.17) 33.6,8.89 R14.2 34,7.9 C23.1 ; C36.2 35.61,6.85 U4.4 34.28,6.85 33.66,6.22 ; 33.66,6.22 33.66,6.64 C40.1 ; 33.66,6.22 U4.9 ; J1.8 v1(42.64,0.92) ; v1(34.47,13.34) 33.59,12.46 C24.2 ; J1.6 v1(37.74,0.92) ; U4.1 34.28,5.35 33.66,5.97 U4.9 ; C1.1 v1(12.83,0.2) ; v1(43.28,4.06) 42.42,4.93 C37.1 ; v1(16.89,13.72) 16.89,14.35 17.18,14.64 R9.2 ; R22.1 v1(41.27,15.32) ; v1(35.74,10.26) 35.53,10.26 34.99,10.81 C27.1 ; U4.6 33.4,6.35 U4.9 ; C30.1 43.4,15.18 v1(43.61,15.39) ; v1(34.87,15.09) 34.95,15.16 37.33,15.16 R16.2 C25.1 38.61,14.96 38.99,15.34 v1(40.67,15.34) 40.39,15.06 R23.2 ; R7.1 v1(10.16,0.2) ; C43.1 C41.1 C42.1 32.8,2.15 v1(32.38,1.73) ; C2.1 v1(11.94,0.2) ; J1.5 42.21,3.6 v1(42.21,3.6) ; C22.2 v1(37.21,5.42) C33.1 C34.2 ; U3.28 37.86,9.29 U3.41 ; J1.9 v1(44.04,1.99) ; J1.7 v1(40.2,0.92) ; R4.1 v1(13.72,0.2)
  BOTTOM w0.102: C7.1 17.74,9.66 v1(17.9,9.5) ; v1(17.9,8.85) 17.87,8.81 C9.1 ; C13.1 15.56,6.64 v1(15.95,6.25) ; v1(30.25,10.24) 30.25,10.13 29.99,9.87 U6.4 28.81,10.52 28.81,10.54 ; v1(16.6,8.85) 16.34,8.59 C14.1 ; C46.1 15.05,9.11 v1(14.66,9.5) ; C10.1 15.79,10.63 v1(15.95,10.8) ; v1(16.6,6.25) 16.72,6.13 C8.1 ; 9.69,8.85 v1(10.76,8.85) ; C11.1 15.79,5.12 v1(15.95,4.95) ; 9.69,5.37 v1(9.72,5.34) ; C12.1 12.77,8.26 v1(13.36,8.85)
  BOTTOM w0.203: O1.2 7.58,8.14 C4.2 7.37,8.89 v1(7.09,9.17) ; U2.18 29.84,15.03 30.35,14.51 v1(30.35,14.5) ; F1.2 v1(2.67,12.62) ; U2.1 28.81,10.54 ; C31.2 40.13,3.35 v1(39.22,2.44) ; v1(44.65,8.71) 44.39,8.98 C21.1 C29.2 ; F1.23 v1(0.96,14.82) ; 36.36,3.47 35.96,3.87 J2.8 ; 36.36,3.47 J2.6 ; 36.36,3.47 36.37,3.45 v1(36.83,3.45) 36.76,3.52 J2.4 ; J2.21 v1(32.38,1.73) ; J2.22 33.66,3.67 v1(33.66,3.58) ; F1.21 6.83,3.12 7.26,2.69 v1(7.26,2.11) ; v1(38.35,3.81) 38.61,4.06 C19.2 C32.2 ; C17.2 33.32,14.73 v1(33.78,14.27) ; 9.69,5.37 9.47,5.59 C3.2 8.55,6.08 8.94,6.48 O1.4 ; 23.26,13.83 22.76,14.33 v1(22.76,14.86) ; 23.26,13.83 25.61,13.83 U2.11 26.07,13.83 26.39,13.52 26.39,13.11 26.1,12.83 U2.9 ; 23.26,13.83 23.71,13.38 C18.1 C16.1 ; C5.1 9.36,8.81 9.66,8.81 9.69,8.85 ; J2.19 v1(37.91,2.55) ; C6.2 9.27,11.48 8.94,11.81 8.94,12.29 v1(9.22,12.57) ; J2.2 37.16,3.84 37.47,3.53 v1(37.91,3.53) J2.20 ; C39.1 v1(27.34,0.23) ; C15.2 33.22,13.46 v1(33.5,13.74) ; F1.24 v1(4.93,0.92)
  vias: v1(33.44,6.61) v1(33.44,6.1) v1(33.44,5.59) v1(33.87,6.61) v1(33.87,6.1) v1(33.87,5.59) v1(37.27,11.55) v1(37.27,10.92) v1(37.27,10.28) v1(37.27,9.65) v1(37.27,9.01) v1(37.9,11.55) v1(37.9,10.92) v1(37.9,10.28) v1(37.9,9.65) v1(37.9,9.01) v1(38.54,11.55) v1(38.54,10.92) v1(38.54,10.28) v1(38.54,9.65) v1(38.54,9.01) v1(39.17,11.55) v1(39.17,10.92) v1(39.17,10.28) v1(39.17,9.65) v1(39.17,9.01) v1(39.81,11.55) v1(39.81,10.92) v1(39.81,10.28) v1(39.81,9.65) v1(39.81,9.01) v1(40.44,11.55) v1(40.44,10.92) v1(40.44,10.28) v1(40.44,9.65) v1(40.44,9.01)
VBAT: length 14.4
  TOP w0.203: U4.2 35.77,5.85 C36.1 ; C33.2 38.26,6.35 38.26,6.98 ; 38.26,6.98 v1(38.26,6.99) U3.34 ; 38.26,6.98 37.86,7.38 U3.33 ; C36.1 36.25,5.37 v1(36.25,5.23) 36.25,3.4 v1(36.75,2.9) ; C36.1 35.73,5.8 35.18,6.35 U4.3
  BOTTOM w0.203: 36.77,2.88 v1(36.75,2.9) ; 36.77,2.88 36.76,2.88 J2.3 ; 36.77,2.88 37.16,2.49 J2.1 ; v1(36.25,5.23) 36.25,6.25 36.73,6.73 38.01,6.73 v1(38.26,6.99)
VDDA: length 5.8
  TOP w0.102: v1(9.98,3.84) 10.12,3.97 U1.P1 ; v1(10.01,3.3) 10.03,3.32 U1.R1 ; v1(11.33,2.18) 11.18,2.03 11.18,1.69 L1.2 C2.2 C1.2
  BOTTOM w0.102: v1(11.33,2.18) 11.13,2.18 v1(10.01,3.3) 9.98,3.33 v1(9.98,3.84)
BOOT0: length 4.2
  TOP w0.102: U1.D6 v1(13.36,10.8) ; R3.2 12.06,13.42 v1(12.06,12.93)
  BOTTOM w0.102: v1(12.06,12.93) 13.36,11.64 v1(13.36,10.8)
BOOT1: length 5.5
  TOP w0.102: U1.M6 v1(13.36,4.95) ; R4.2 13.09,2.18 12.5,2.18 v1(12.32,2.36)
  BOTTOM w0.102: v1(12.32,2.36) 12.32,4.4 12.54,4.63 13.03,4.63 v1(13.36,4.95)
BYPASS: length 8.4
  TOP w0.102: v1(8.22,2.18) 8.39,2.01 9.72,2.01 R7.2 ; U1.L4 12.11,5.65 v1(12.08,5.65)
  BOTTOM w0.102: v1(12.08,5.65) 11.73,5.3 11.73,4.79 11.16,4.22 9.86,4.22 8.22,2.57 v1(8.22,2.18)
FMC_A0: length 29.1
  TOP w0.102: U5.H7 v1(25.03,5.12) ; U1.E2 10.76,10.15 v1(10.76,10.15)
  SIG2 w0.102: v1(25.03,5.12) 24.69,5.46 23.7,5.46 23.06,6.1 23.06,7.77 23.5,8.2 23.5,10.29 22.35,11.43 22.35,14.02 21.26,15.11 13.64,15.11 11.99,13.47 10.98,13.47 9.53,12.01 9.53,11.13 9.78,10.87 10.1,10.87 10.76,10.22 v1(10.76,10.15)
FMC_A1: length 27
  TOP w0.102: v1(11.43,7.59) 11.45,7.59 U1.H3 ; U5.H8 v1(25.03,3.58)
  SIG2 w0.102: v1(11.43,7.59) 11.09,7.26 10.16,7.26 8.31,5.4 8.31,3.53 10.85,0.99 19.96,0.99 20.52,0.43 v1(20.84,0.43)
  BOTTOM w0.102: v1(25.03,3.58) 24.66,3.21 24.66,2.62 24,1.96 23.22,1.96 22.38,1.12 22.38,0.57 22.03,0.22 21.56,0.22 21.35,0.43 v1(20.84,0.43)
FMC_A2: length 25.9
  TOP w0.102: U5.J8 v1(24.23,3.58) ; U1.H2 10.82,7.61 v1(10.77,7.61)
  SIG2 w0.102: v1(10.77,7.61) 10.23,7.61 8.08,5.46 8.08,3.47 10.76,0.79 19.66,0.79 v1(19.81,0.64)
  BOTTOM w0.102: v1(24.23,3.58) 24.23,3.35 22.15,1.27 22.15,0.63 21.94,0.42 21.65,0.42 21.36,0.71 21.05,0.71 20.98,0.78 20.68,0.78 20.53,0.64 v1(19.81,0.64)
FMC_A3: length 25
  TOP w0.102: v1(24.22,5.11) 24.21,5.11 U5.J7 ; v1(10.74,6.88) 10.74,6.89 U1.J2
  SIG2 w0.102: v1(10.74,6.88) 10.07,6.88 8.51,5.32 8.51,3.62 10.91,1.22 20.26,1.22 v1(20.43,1.05)
  BOTTOM w0.102: v1(20.43,1.05) 20.99,1.05 21.13,0.91 21.43,0.91 21.64,1.12 21.64,1.33 23.47,3.17 23.47,4.35 v1(24.22,5.11)
FMC_A4: length 31.4
  TOP w0.102: v1(24.2,8.3) U5.J3 ; U1.J3 11.4,6.9 v1(11.4,6.86)
  SIG2 w0.102: v1(11.4,6.86) 11.07,6.53 10.06,6.53 8.71,5.18 8.71,3.7 10.99,1.42 20.56,1.42 21.21,0.78 v1(21.79,0.78) ; v1(24.2,8.3) 23.32,7.42 23.32,6.35 23.88,5.79 24.86,5.79 25.45,5.2 25.45,4.66 v1(25.13,4.34)
  BOTTOM w0.102: v1(21.79,0.78) 21.95,0.93 21.95,1.35 23.8,3.21 23.8,3.66 24.48,4.34 v1(25.13,4.34)
FMC_A5: length 29.7
  TOP w0.102: v1(11.38,6.23) U1.K3 ; U5.J2 v1(24.23,9.12)
  SIG2 w0.102: 25.53,6.07 v1(25.5,6.07) 25.4,6.17 25.4,7.95 v1(24.23,9.12) ; v1(21.28,1.27) 20.93,1.63 11.07,1.63 8.92,3.78 8.92,5.1 10.05,6.23 v1(11.38,6.23)
  BOTTOM w0.102: v1(25.5,6.07) 24.91,5.48 23.49,5.48 22.91,4.9 22.91,3.71 22.25,3.05 22.25,2.24 v1(21.28,1.27)
FMC_A6: length 19.3
  TOP w0.102: U5.H3 v1(25.03,7.58) ; v1(12.94,2.74) 13.36,3.16 13.36,3.65 U1.P6
  SIG2 w0.102: v1(25.03,7.58) 25.1,7.51 25.1,6.17 v1(25.03,6.11)
  BOTTOM w0.102: v1(25.03,6.11) 24.65,5.73 23.43,5.73 22.68,4.98 22.68,3.77 22.05,3.14 22.05,2.61 20.96,1.52 13.79,1.52 12.94,2.37 v1(12.94,2.74)
FMC_A7: length 22
  TOP w0.102: v1(24.54,6.24) 24.66,6.24 25.2,6.78 v1(26.19,6.78) ; U5.H2 v1(25.03,9.12) ; v1(13.36,4.3) U1.N6
  SIG2 w0.102: v1(25.03,9.12) 26.19,7.96 v1(26.19,6.78)
  BOTTOM w0.102: v1(24.54,6.24) 24.22,5.93 23.35,5.93 22.48,5.06 22.48,3.85 21.84,3.22 21.84,2.7 20.95,1.8 13.87,1.8 13.32,2.35 13.32,4.27 v1(13.36,4.3) 13.34,4.3
FMC_A8: length 19
  TOP w0.102: v1(23.76,6.63) 23.68,6.63 23.29,7.01 23.29,9.88 23.7,10.29 24.59,10.29 v1(25.03,9.86) 24.96,9.86 U5.H1 ; U1.R7 14.33,2.69 14.51,2.51 v1(14.51,2.49)
  BOTTOM w0.102: v1(14.51,2.49) 14.58,2.41 20.98,2.41 21.44,2.87 21.44,3.39 22.07,4.02 22.07,5.23 23.47,6.63 v1(23.76,6.63)
FMC_A9: length 17.4
  TOP w0.102: U1.P7 14.01,3.65 14.01,2.92 14.04,2.89 v1(14.04,2.44) ; v1(24.07,6.28) 24.55,6.76 24.84,6.76 25.24,7.16 25.41,7.16 v1(25.83,7.58) U5.G3
  BOTTOM w0.102: v1(24.07,6.28) 24.06,6.27 23.4,6.27 22.28,5.15 22.28,3.94 21.64,3.3 21.64,2.78 20.99,2.14 14.34,2.14 v1(14.04,2.44)
FMC_A10: length 14.2
  TOP w0.102: U1.N7 14.07,4.36 v1(14.07,4.32) ; U5.H9 25.01,2.79 v1(25.03,2.79) 24.59,2.36 23.83,2.36 23.5,2.69 23.5,3.5 23.21,3.78 22.78,3.78 22.1,3.1 v1(20.88,3.1)
  BOTTOM w0.102: v1(20.88,3.1) 14.76,3.1 14.07,3.79 v1(14.07,4.32)
FMC_A11: length 20.2
  TOP w0.102: U1.M7 v1(14.01,4.95) ; v1(23.7,7.11) 23.75,7.16 v1(24.69,7.16) ; U5.G2 25.77,9.07 25.86,9.07 v1(25.87,9.08)
  BOTTOM w0.102: v1(14.01,4.95) 13.71,4.66 13.71,3.79 14.88,2.62 20.9,2.62 21.23,2.95 21.23,3.51 21.87,4.14 21.87,5.31 23.67,7.11 v1(23.7,7.11) ; v1(25.87,9.08) 26.29,8.66 26.29,7.49 25.95,7.16 v1(24.69,7.16)
FMC_A12: length 13.1
  TOP w0.102: U5.G1 25.45,10.29 26.01,10.85 26.01,11.15 25.32,11.84 23.24,11.84 22.48,11.07 22.48,8.74 21.77,8.03 20.93,8.03 20.4,7.51 20.4,6.33 20,5.92 U1.L15
FMC_D0: length 22.3
  TOP w0.102: U5.A8 v1(30.63,3.58) ; U1.M14 19.2,4.95 19.25,5 19.74,5 20.97,6.23 v1(20.97,7.26)
  SIG2 w0.102: v1(20.97,7.26) 20.97,6.31 21.83,5.46 21.83,4.3 21.36,3.84 21.36,2.33 22.08,1.62 22.59,1.62 23.55,0.66 29.44,0.66 30.7,1.92 30.7,1.92 31.01,2.24 31.01,3.19 v1(30.63,3.58)
FMC_D1: length 21
  TOP w0.102: v1(30.05,1.78) 30.05,2.55 U5.B9 ; v1(21.33,7.65) 20.86,7.65 20.62,7.41 20.62,6.16 20.05,5.6 19.2,5.6 U1.L14
  SIG2 w0.102: v1(30.05,1.78) 29.21,0.94 29.17,0.92 29.11,0.86 23.63,0.86 22.67,1.82 22.16,1.82 21.56,2.42 21.56,3.73 22.04,4.2 22.04,5.53 21.33,6.25 21.33,7.64 v1(21.33,7.65)
FMC_D2: length 24.1
  TOP w0.102: U5.B8 v1(29.83,3.58) ; U1.B12 v1(17.9,12.1)
  SIG2 w0.102: v1(17.9,12.1) 20.14,12.1 22.48,9.75 22.48,8.63 22,8.14 22,7.5 21.73,7.23 21.73,6.41 22.45,5.7 22.45,4.02 21.97,3.55 21.97,2.59 22.33,2.23 22.84,2.23 23.8,1.27 27.89,1.27 29.83,3.21 v1(29.83,3.58)
FMC_D3: length 23.1
  TOP w0.102: U1.C12 v1(17.9,11.45) ; U5.C9 29.03,2.78 29.03,1.87 v1(28.93,1.78)
  SIG2 w0.102: v1(28.93,1.78) 28.22,1.07 23.71,1.07 22.75,2.03 22.24,2.03 21.77,2.5 21.77,3.63 22.24,4.11 22.24,5.62 21.53,6.33 21.53,7.32 21.79,7.58 21.79,8.34 22.28,8.82 22.28,9.65 20.48,11.45 v1(17.9,11.45)
FMC_D4: length 16.9
  TOP w0.102: U5.C8 v1(29.03,3.58) ; U1.R8 14.98,3.18 16.33,1.83 22.84,1.83 23.36,1.3 26.07,1.3 v1(26.4,1.63)
  SIG2 w0.102: v1(29.03,3.58) 29.03,2.81 27.84,1.63 v1(26.4,1.63)
FMC_D5: length 18.4
  TOP w0.102: U5.D9 28.15,2.85 v1(28.22,2.85) 28.22,1.8 27.18,0.76 23.67,0.76 23.15,0.23 22.7,0.23 22.35,0.58 22.35,1.17 21.9,1.62 15.98,1.62 14.66,2.94 14.66,3.65 U1.P8
FMC_D6: length 16.6
  TOP w0.102: U1.P9 15.95,3.65 15.95,2.78 16.5,2.23 22.02,2.23 v1(22.61,2.82) ; U5.D8 v1(28.23,3.58)
  SIG2 w0.102: v1(28.23,3.58) 28.6,3.2 28.6,2.67 27.94,2.01 23.63,2.01 22.82,2.82 v1(22.61,2.82)
FMC_D7: length 14.6
  TOP w0.102: v1(23.1,3.4) 23.1,2.81 22.32,2.03 16.41,2.03 15.63,2.82 U1.R9 ; U5.E9 27.41,2.79 v1(27.43,2.79)
  SIG2 w0.102: v1(27.43,2.79) 27.05,2.42 24.07,2.42 v1(23.1,3.4)
FMC_D8: length 22.1
  TOP w0.102: v1(21.01,9.04) 22.05,10.08 22.05,11.25 23.04,12.24 25.6,12.24 27.05,10.79 U5.E1 ; U1.P10 16.6,3.65 16.6,3.15 17.11,2.64 19.81,2.64 20.32,3.15 20.32,3.33 20.62,3.64 20.62,3.93 20.93,4.24 v1(21.13,4.24)
  SIG2 w0.102: v1(21.13,4.24) 20.9,4.47 20.9,5.1 20.17,5.83 20.17,7.56 21.01,8.4 v1(21.01,9.04)
FMC_D9: length 25.6
  TOP w0.102: U1.R10 16.28,2.83 16.67,2.44 19.9,2.44 20.52,3.06 20.52,3.25 20.98,3.7 v1(20.98,3.78) ; U5.D2 28.19,9.09 28.24,9.09 28.24,11.33 26.9,12.67 22.88,12.67 21.53,11.33 21.53,10.18 21.16,9.8 20.9,9.8 20.72,9.62 v1(20.58,9.62)
  SIG2 w0.102: v1(20.98,3.78) 20.7,4.06 20.7,4.9 19.96,5.64 19.96,7.65 20.62,8.31 20.62,9.58 v1(20.58,9.62)
FMC_D10: length 23
  TOP w0.102: v1(20.27,9.14) 20.6,9.14 20.88,9.42 21.07,9.42 21.77,10.13 21.77,11.28 22.96,12.47 26.56,12.47 27.85,11.18 U5.D1 ; U1.N11 v1(17.25,4.3)
  SIG2 w0.102: v1(20.27,9.14) 19.76,8.64 19.76,5.49 20.47,4.78 20.47,3.35 20.17,3.04 17.56,3.04 17.25,3.35 v1(17.25,4.3)
FMC_D11: length 26.1
  TOP w0.102: v1(21.46,5.08) 20.97,5.08 20.22,4.33 20.22,3.8 19.91,3.5 19.91,3.32 19.64,3.05 17.47,3.05 17.3,3.21 17.3,3.6 U1.P11 ; v1(20.97,10.41) 21.09,10.53 21.09,11.46 22.71,13.08 27.56,13.08 29.03,11.61 29.03,9.12 U5.C2
  SIG2 w0.102: v1(20.97,10.41) 21.56,9.82 21.56,8.38 20.62,7.44 20.62,6.33 21.46,5.49 v1(21.46,5.08)
FMC_D12: length 24.9
  TOP w0.102: U1.R11 16.93,3.11 17.2,2.84 19.73,2.84 20.12,3.23 20.12,3.41 20.42,3.72 20.42,4.03 20.99,4.6 21.42,4.6 v1(21.44,4.58) ; U5.C1 28.65,11.48 27.25,12.88 22.8,12.88 21.33,11.41 21.33,10.26 21.12,10.05 20.68,10.05 v1(20.66,10.07)
  SIG2 w0.102: v1(21.44,4.58) 21.11,4.91 21.11,5.33 20.37,6.07 20.37,7.48 21.36,8.47 21.36,9.37 v1(20.66,10.07)
FMC_D13: length 17.8
  TOP w0.102: v1(25.65,11) 25.26,11.39 24.93,11.39 24.64,11.1 24.64,11.03 24.33,10.72 23.42,10.72 22.89,10.19 22.89,8.34 21.69,7.15 21.69,6.38 19.81,4.5 19.81,4.26 U1.P15 ; U5.B2 v1(29.83,9.12)
  SIG2 w0.102: v1(25.65,11) 25.86,11.2 29.57,11.2 29.87,10.9 29.87,9.17 v1(29.83,9.12)
FMC_D14: length 16.8
  TOP w0.102: v1(29.45,10.67) U5.B1 ; v1(25.08,11.04) 24.56,10.52 23.57,10.52 23.09,10.03 23.09,8.26 21.89,7.06 21.89,6.29 20.02,4.41 20.02,4.07 19.64,3.7 19.25,3.7 19.2,3.65 U1.P14
  SIG2 w0.102: v1(25.08,11.04) 25.08,11.02 25.48,10.61 29.4,10.61 v1(29.45,10.67)
FMC_D15: length 18.4
  TOP w0.102: U5.A2 30.56,9.06 v1(30.56,9.11) ; U1.N15 19.65,4.62 21.49,6.46 21.49,7.26 22.68,8.45 22.68,10.74 v1(23.32,11.38)
  SIG2 w0.102: v1(30.56,9.11) 30.84,9.39 30.84,10.52 29.86,11.49 23.43,11.49 v1(23.32,11.38)
LCD_B0: length 14
  TOP w0.102: v1(4.19,6.35) 4.19,10.9 6.52,13.22 9.07,13.22 9.95,12.35 9.95,12.22 10.4,11.77 U1.B1
  BOTTOM w0.102: F1.15 4.42,6.12 v1(4.19,6.35)
LCD_B1: length 23.8
  TOP w0.102: v1(3.81,6.71) 3.99,6.88 3.99,7.95 2.74,9.19 2.74,11.08 6.72,15.06 14.15,15.06 14.94,14.27 14.94,13.03 14.68,12.78 14.68,12.07 U1.B8
  BOTTOM w0.102: F1.14 4.42,6.62 4.34,6.71 v1(3.81,6.71)
LCD_B2: length 25
  TOP w0.102: v1(3.63,7.16) 3.59,7.16 3.23,7.52 3.23,8.03 2.34,8.92 2.34,11.25 6.55,15.47 14.5,15.47 15.98,14 15.98,12.08 U1.B10
  BOTTOM w0.102: F1.13 3.67,7.12 v1(3.63,7.16)
LCD_B3: length 23.6
  TOP w0.102: v1(3.63,7.62) 3.63,7.98 2.54,9.07 2.54,11.17 6.64,15.27 14.36,15.27 15.34,14.28 15.34,12.06 U1.B9
  BOTTOM w0.102: v1(3.63,7.62) 5.66,7.62 F1.12
LCD_B4: length 17.6
  TOP w0.102: v1(3.81,8.64) 3.75,8.64 2.97,9.42 2.97,11 6.07,14.1 10.13,14.1 v1(11.13,13.11) ; U1.D4 v1(12.06,10.8)
  BOTTOM w0.102: F1.10 5.65,8.64 v1(3.81,8.64) ; 12.04,10.8 v1(12.06,10.8) 12.06,11.18 11.13,12.12 v1(11.13,13.11)
LCD_B5: length 15.8
  TOP w0.102: v1(3.81,9.09) 3.76,9.09 3.17,9.68 3.17,10.87 6.2,13.89 9.78,13.89 10.92,12.75 11.15,12.75 11.37,12.52 11.37,12.39 11.62,12.14 11.76,12.14 12.06,11.84 12.06,11.45 U1.C4
  BOTTOM w0.102: v1(3.81,9.09) 5.63,9.09 F1.9
LCD_B6: length 14.1
  TOP w0.102: U1.C3 11.41,11.45 11.41,11.84 11.11,12.14 10.97,12.14 10.74,12.37 10.74,12.5 9.61,13.64 6.27,13.64 3.43,10.79 3.43,9.93 v1(3.78,9.58)
  BOTTOM w0.102: F1.8 5.61,9.58 v1(3.78,9.58)
LCD_B7: length 12.3
  TOP w0.102: U1.C2 10.76,11.45 10.76,11.84 10.45,12.15 10.32,12.15 10.15,12.31 10.15,12.54 9.26,13.43 6.39,13.43 3.81,10.85 v1(3.81,10.11)
  BOTTOM w0.102: v1(3.81,10.11) 5.65,10.11 F1.7
OSC32-IN: length 3.3
  TOP w0.102: U1.E1 v1(9.98,9.82)
  BOTTOM w0.102: O2.2 8,11.13 8.88,10.25 C6.1 9.55,10.25 v1(9.98,9.82)
OSC32-OUT: length 2.7
  TOP w0.102: v1(9.98,9.2) 10.01,9.17 U1.F1
  BOTTOM w0.102: O2.1 8.64,9.86 8.93,9.56 C5.2 9.59,9.56 9.95,9.2 v1(9.98,9.2)
OSC-IN: length 3
  TOP w0.102: U1.G1 10,8.52 v1(9.97,8.49)
  BOTTOM w0.102: v1(9.97,8.49) 9.97,8.48 9.39,7.9 O1.3 8.42,8.43 C4.1
OSC-OUT: length 4.4
  TOP w0.102: v1(9.91,7.92) 9.94,7.92 9.94,7.87 10,7.87 10.03,7.91 10.32,7.91 10.36,7.87 U1.H1
  BOTTOM w0.102: v1(9.91,7.92) 9.91,7.75 9.4,7.24 8.48,7.24 O1.1 7.71,6.47 C3.1
PDR_ON: length 3.4
  TOP w0.102: U1.C6 13.39,11.42 13.39,11.81 13.11,12.09 12.97,12.09 12.75,12.31 12.75,12.78 12.78,12.8 12.78,13.25 R5.2
RESET: length 11.4
  TOP w0.102: U1.J1 8.02,7.22 7.33,7.91 v1(7.16,7.91) ; v1(8.58,1.41) 8.73,1.56 R6.1
  SIG2 w0.102: v1(8.58,1.41) 8.58,1.58 8.57,1.59 8.57,2.6 7.82,3.35 7.82,7.29 7.2,7.91 v1(7.16,7.91)
SWCLK: length 3
  TOP w0.102: R9.1 v2(17.9,13.8) ; U1.A14 18.88,12.43 v1(19.18,12.73)
  BOTTOM w0.102: v1(17.91,13.82) 18.08,13.82 v1(19.18,12.73)
SWDIO: length 2.8
  TOP w0.102: U1.A15 19.53,12.47 19.79,12.73 19.79,12.73 v1(19.79,12.73) ; R8.1 20.42,13.8 20.51,13.89 v2(20.58,13.89)
  BOTTOM w0.102: v2(20.58,13.89) 19.79,13.1 v1(19.79,12.73)
SYS: length 11.5
  TOP w0.203: 38.86,6.99 v1(38.86,6.99) ; 38.86,6.99 38.66,7.19 U3.35 ; 38.86,6.99 39.06,7.18 39.06,7.29 39.06,7.3 U3.36 ; v1(42.04,11.81) 41.91,11.69 U3.9 ; C22.1 37.21,6.91 v1(37.46,7.16) 37.46,7.16 U3.32 ; v1(35.73,10.79) 35.81,10.79 35.91,10.89 U3.24 ; C24.1 35.42,12.19 v1(35.69,11.93) 35.93,11.69 U3.22
  BOTTOM w0.203: v1(42.04,11.81) 42.04,11.25 42.37,10.92 C29.1 ; C32.1 C19.1 38.61,6.73 v1(38.86,6.99) ; L2.2 41.78,4.72 v1(42.55,3.96)
VCAP_1: length 1.3
  TOP w0.102: U1.M10 v1(16.6,4.95)
  BOTTOM w0.102: v1(16.6,4.95) 16.94,5.3 C8.2
VCAP_2: length 1.1
  TOP w0.102: U1.F13 v1(18.55,9.5)
  BOTTOM w0.102: C7.2 18.55,10.13 v1(18.55,9.5)
VCHG: length 7.3
  TOP w0.203: J1.1 39.09,3.04 38.7,2.66 v1(38.7,2.61) ; U3.37 v1(39.46,7.12)
  BOTTOM w0.203: v1(38.7,2.61) 39.37,3.28 39.37,5.59 39.94,6.16 C31.1 40.13,6.45 v1(39.46,7.12)
VRTC: length 40.4
  TOP w0.102: v1(24.64,14.99) 24.92,14.71 28.79,14.71 32.82,10.68 32.82,8.97 33.15,8.64 33.15,7.79 33.75,7.19 35.99,7.19 36.45,6.73 36.45,6.15 36.75,5.84 38.82,5.84 C34.1 39.86,6.88 U3.38 ; v1(9.88,11.79) 9.93,11.79 10.43,11.29 U1.C1
  BOTTOM w0.102: v1(9.88,11.79) 9.86,11.81 9.86,13.36 11.73,15.24 24.38,15.24 v1(24.64,14.99)
N58225: length 4.6
  TOP w0.203: v1(7.19,3.61) 7.14,3.56 R27.1
  BOTTOM w0.203: v1(7.19,3.61) 7.17,3.62 F1.20
N76608: length 1.1
  BOTTOM w0.102: U2.12 25.6,14.34 24.56,14.34 R10.1
N76702: length 1.2
  BOTTOM w0.102: C18.2 24.89,13.08 25.14,13.33 U2.10
N76822: length 2.1
  BOTTOM w0.102: C15.1 30.38,13.46 30.01,13.83 U2.20
N84564: length 2.3
  TOP w0.203: U3.20 37.06,13.11 37.44,13.49 38.16,13.49 C25.2
N85062: length 7.5
  TOP w0.203: U3.6 42.03,10.49 v1(42.04,10.49) ; D1.2 43.56,6.29 v1(44.51,6.29)
  SIG2 w0.203: v1(42.04,10.49) 42.04,10.49 42.14,10.49 42.15,10.49 42.48,10.49 42.49,10.49 42.98,10.49 43.94,9.53 43.94,6.86 v1(44.51,6.29)
N85526: length 8.8
  TOP w0.203: U3.4 42.08,9.69 v1(42.09,9.68) 42.79,9.68 R19.2 ; v1(44.42,4.88) 43.57,4.88 D1.1
  SIG2 w0.203: v1(44.42,4.88) 43.33,5.97 43.33,8.69 42.34,9.68 v1(42.09,9.68)
N85983: length 1.4
  TOP w0.203: R22.2 41.27,13.67 40.66,13.05 U3.11
N86193: length 1.4
  TOP w0.203: R24.1 39.55,13.93 39.88,13.61 39.88,13.27 39.86,13.25 U3.13
N86197: length 2.5
  TOP w0.203: R24.2 39.55,14.77 R23.1 40.39,13.56 40.26,13.44 40.26,12.74 U3.12
N86348: length 3.7
  TOP w0.203: U3.1 42.02,8.49 R25.1 42.42,6.64 C37.2
N86681: length 2.2
  TOP w0.203: C38.2 43.05,11.81 42.14,10.9 41.32,10.9 U3.7
N87122: length 2
  TOP w0.203: v1(40.92,7.09) 40.66,7.34 U3.40
  BOTTOM w0.203: L2.1 41.59,6.41 v1(40.92,7.09)
N92103: length 5.9
  TOP w0.203: 42.65,8.75 R12.1 ; 42.65,8.75 v1(42.65,8.74) ; 42.65,8.75 42.51,8.89 U3.2 ; C20.1 R11.1 41.53,7.02 v1(42.14,7.64)
  BOTTOM w0.203: v1(42.14,7.64) 42.65,8.14 v1(42.65,8.74)
N92575: length 2.9
  TOP w0.203: v1(36.74,7.24) 36.83,7.24 37.06,7.47 U3.31
  BOTTOM w0.203: v1(36.74,7.24) 34.74,7.24 L3.1
N92645: length 2.5
  TOP w0.203: R13.1 R14.1 34.84,8.89 U3.29
N93770: length 4.1
  TOP w0.203: R16.1 C26.1 R15.1 35.76,13.75 35.76,12.45 36.12,12.09 U3.21
N94238: length 1.7
  TOP w0.203: v1(35.73,11.29) U3.23
  BOTTOM w0.203: L4.1 34.99,10.77 35.5,11.29 v1(35.73,11.29)
N94612: length 5.4
  TOP w0.203: 43.14,13.46 43.5,13.46 v1(43.59,13.37) ; 43.14,13.46 42.83,13.78 C30.2 41.31,12.67 U3.10 ; 43.14,13.46 R20.1
  BOTTOM w0.203: v1(43.59,13.37) L5.2
N94775: length 3
  TOP w0.203: v1(42.12,12.57) 42.44,12.25 42.44,11.64 42.09,11.29 U3.8
  BOTTOM w0.203: L5.1 v1(42.12,12.57)
N95538: length 1.9
  TOP w0.203: U3.3 41.33,9.27 42.26,9.27 42.27,9.29 43,9.29 C35.1
N108220: length 3.3
  TOP w0.102: J1.2 39.75,3.58 v1(39.75,2.29)
  BOTTOM w0.102: v1(39.75,2.29) 39.75,1.91 40.26,1.4 R17.1
N108232: length 2
  TOP w0.102: v1(40.39,2.29) J1.3
  BOTTOM w0.102: R18.1 v1(40.39,2.29)
N192986: length 29.5
  TOP w0.102: U5.G9 25.45,2.01 25.1,1.65 v1(24.97,1.65) ; v1(13.23,12.95) 13.36,12.83 13.36,12.13 13.68,11.8 U1.B6
  SIG2 w0.102: v1(13.23,12.95) 13.23,13.69 14.25,14.71 20.89,14.71 21.84,13.75 21.84,11.31 23.09,10.07 23.09,8.37 22.65,7.94 22.65,3.93 22.21,3.49 22.21,2.71 22.49,2.43 22.92,2.43 23.7,1.65 v1(24.97,1.65)
  BOTTOM w0.102: v1(24.97,1.65) 25.14,1.65 25.44,1.36 R28.2
N192988: length 22.1
  TOP w0.102: U1.M2 10.79,4.98 v1(10.79,4.94) ; v1(23,0.59) 23.37,0.96 26.24,0.96 26.75,1.48 26.75,2.65 U5.F9
  SIG2 w0.102: v1(23,0.59) 22.48,0.59 21.24,1.83 11.18,1.83 10.79,2.22 v1(10.79,4.94)
N192990: length 23.6
  TOP w0.102: U1.B7 14.01,12.1 14.01,13.12 v1(14.1,13.21) ; v1(22.25,6.5) 23.24,5.51 26.24,5.51 v1(26.63,5.12) U5.F7
  SIG2 w0.102: v1(14.1,13.21) 14.1,13.86 14.53,14.3 20.7,14.3 21.29,13.72 21.29,11.3 22.68,9.9 22.68,8.54 22.2,8.06 22.2,7.41 21.94,7.15 21.94,6.81 22.25,6.5 v1(22.25,6.5)
N192992: length 16.1
  TOP w0.102: U1.R6 v1(13.68,2.75) ; U5.F8 v1(26.63,3.58)
  SIG2 w0.102: v1(13.68,2.75) 13.68,2.29 13.91,2.06 21.34,2.06 22.44,0.96 v1(22.74,0.96)
  BOTTOM w0.102: v1(26.63,3.58) 26.15,3.1 25.85,3.1 23.72,0.96 v1(22.74,0.96)
N192994: length 24.4
  TOP w0.102: v1(26.64,7.58) 26.63,7.58 ; 26.63,7.58 26.63,6.15 26.19,5.72 23.59,5.72 22.35,6.96 v1(22.29,6.96) ; 26.63,7.58 U5.F3 ; U1.A6 13.68,13.14 v1(13.64,13.17)
  SIG2 w0.102: v1(13.64,13.17) 13.64,13.69 14.45,14.5 20.79,14.5 21.56,13.72 21.56,11.3 22.89,9.98 22.89,8.46 22.4,7.97 22.4,7.07 v1(22.29,6.96)
N192996: length 13.4
  TOP w0.102: 26.67,9.17 26.63,9.12 ; 26.63,9.12 U5.F2 ; 26.63,9.12 26.63,10.86 25.45,12.04 23.14,12.04 22.28,11.18 22.28,9.96 21.51,9.19 21.51,9.05 21.15,8.69 21.01,8.69 19.88,7.55 19.2,7.55 U1.H14
N192998: length 30.3
  TOP w0.102: U1.A4 12.38,12.74 12.42,12.78 v1(12.42,13.25) ; U5.E8 v1(27.43,3.58)
  SIG2 w0.102: v1(27.43,3.58) 27.81,3.19 27.81,2.64 27.39,2.22 23.72,2.22 22.71,3.22 22.71,3.66 22.86,3.81 22.86,7.85 23.29,8.29 23.29,10.15 22.1,11.35 22.1,13.78 20.97,14.91 14,14.91 12.42,13.33 v1(12.42,13.25)
N193000: length 20.9
  TOP w0.102: v1(11.73,13.82) 11.71,13.8 11.71,12.78 11.73,12.76 U1.A3 ; U5.F1 26.25,10.1 v1(26.24,10.11)
  SIG2 w0.102: v1(11.73,13.82) 13.23,15.32 21.62,15.32 22.66,14.27 22.66,11.53 23.93,10.26 26.09,10.26 v1(26.24,10.11)
N193002: length 12.4
  TOP w0.102: v1(25.83,5.12) 25.83,5.12 U5.G7 ; v1(21.92,9.02) 21.92,8.71 21.54,8.33 20.94,8.33 20.2,7.59 20.2,6.85 19.64,6.3 19.25,6.3 19.2,6.25 U1.K14
  BOTTOM w0.102: v1(25.83,5.12) 26.14,5.43 26.14,6.32 25.66,6.8 24.54,6.8 24.33,7.01 24.33,7.54 22.86,9.02 v1(21.92,9.02)
N193004: length 12.4
  TOP w0.102: U1.K13 v1(18.55,6.25) ; U5.G8 v1(25.83,3.58)
  BOTTOM w0.102: v1(18.55,6.25) 20.78,6.25 22,7.47 23.85,7.47 24.05,7.26 24.05,7 24.46,6.6 25.51,6.6 25.88,6.22 25.88,5.82 25.48,5.41 25.48,4.78 25.83,4.43 v1(25.83,3.58)
N193010: length 49
  TOP w0.102: v1(7.18,7.4) 8.01,6.57 U1.K1
  SIG1 w0.102: v1(31.45,1.54) 31.55,1.64 31.55,10.13 28.83,12.85 24.1,12.85 22.05,14.91 9.14,14.91 7.77,13.55 7.77,8 v1(7.18,7.4)
  BOTTOM w0.102: v1(31.45,1.54) 31.07,1.17 28.6,1.17 28.19,1.57 U6.6
N206144: length 32
  TOP w0.102: U1.K2 10.76,6.25 7.13,6.25 v1(7.1,6.22)
  SIG1 w0.102: v1(7.1,6.22) 7.15,6.22 8.38,7.46 8.38,13.28 9.41,14.3 21.23,14.3 23.74,11.8 v1(23.74,11.14)
  BOTTOM w0.102: v1(23.74,11.14) 23.74,10.86 24.16,10.44 25.4,10.44 25.65,10.18 U6.1
N206148: length 36.8
  TOP w0.102: v1(11.42,5.66) 11.43,5.66 11.46,5.69 11.5,5.69 U1.L3
  SIG1 w0.102: v1(24.21,11.1) 24.21,11.2 24.27,11.26 24.27,11.63 21.39,14.5 9.32,14.5 8.18,13.36 8.18,7.54 7.24,6.6 6.88,6.6 6.71,6.43 6.71,6.1 6.93,5.87 7.34,5.87 7.52,5.69 7.52,5.32 7.22,5.03 v1(7.11,5.03)
  BOTTOM w0.102: v1(7.11,5.03) 7.16,4.98 10.21,4.98 10.89,5.66 v1(11.42,5.66) ; U6.2 26.92,10.29 26.7,10.52 25.63,10.52 25.48,10.67 24.51,10.67 24.21,10.97 v1(24.21,11.1)
N206152: length 49.7
  TOP w0.102: v1(7.11,5.51) 9.12,5.51 9.3,5.69 9.96,5.69 10.04,5.6 10.76,5.6 U1.L2
  SIG1 w0.102: v1(31.06,1.78) 31.06,1.78 31.34,2.06 31.34,9.8 28.68,12.47 23.95,12.47 21.72,14.71 9.22,14.71 7.98,13.46 7.98,7.63 7.26,6.91 6.79,6.91 6.48,6.6 6.48,6.04 7,5.51 v1(7.11,5.51)
  BOTTOM w0.102: U6.5 29.46,1.6 29.65,1.42 30.7,1.42 31.04,1.76 31.04,1.76 v1(31.06,1.78)
N209400: length 66.4
  TOP w0.102: v1(12.09,6.91) 12.09,6.93 U1.J4 ; v1(39.47,13.44) 39.47,12.75 U3.14 ; U4.8 33.06,5.35 33.73,4.67 34.11,4.67 34.92,3.86 v1(34.92,2.92)
  SIG1 w0.102: 12.08,6.91 12.04,6.91 12.03,6.9 ; 12.08,6.91 12.07,6.9 ; 12.08,6.91 v1(12.09,6.91) 11.76,7.24 10.6,7.24 8.93,5.57 8.93,3.51 11.1,1.33 19.34,1.33 20.04,2.03 23.27,2.03 24.26,1.04 30.58,1.04 30.85,0.78 32.57,0.78 34.14,2.34 34.14,2.66 34.4,2.92 v1(34.92,2.92) 34.92,2.93 34.92,7.84 36.17,9.09 36.17,11.91 36.73,12.47 38.89,12.47 39.47,13.06 v1(39.47,13.44)
  BOTTOM w0.102: U2.24 32.23,11.83 32.52,12.13 32.53,12.13 32.98,12.57 38.67,12.57 39.37,13.27 39.37,13.34 v1(39.47,13.44) ; R1.2 35.01,1.16 34.76,1.41 J2.13 34.76,2.13 34.92,2.29 v1(34.92,2.92)
N209412: length 71
  TOP w0.102: U1.H4 v1(12.06,7.55) ; U4.7 32.15,5.85 31.95,5.65 31.95,5.26 32.21,5 33.07,5 33.73,4.34 34.04,4.34 34.54,3.84 v1(34.54,2.41) ; v1(39.01,13.42) 39.06,13.37 U3.15
  SIG1 w0.102: v1(39.01,13.42) 39.01,13.61 39.27,13.87 39.64,13.87 39.9,13.61 39.9,13.02 39.07,12.19 36.86,12.19 36.5,11.84 36.5,9.04 35.12,7.67 35.12,3.31 35.31,3.12 35.31,2.74 34.98,2.41 v1(34.54,2.41) 32.7,0.57 30.67,0.57 30.43,0.81 24.1,0.81 23.09,1.83 20.14,1.83 19.38,1.07 9.93,1.07 8.73,2.27 8.73,6.07 10.62,7.97 11.64,7.97 v1(12.06,7.55) 12.06,7.54
  BOTTOM w0.102: U2.23 32.45,12.33 32.89,12.78 38.37,12.78 v1(39.01,13.42) ; R2.2 34.07,1.16 34.36,1.44 J2.15 34.36,2.23 v1(34.54,2.41) ; 12.05,7.55 v1(12.06,7.55)
N209430: length 31.7
  TOP w0.102: U1.C15 19.98,11.57 20.33,11.57 22.45,13.69 28.09,13.69 31.46,10.32 31.46,9.16 v1(32.44,8.18)
  SIG2 w0.102: v1(42.75,1.48) 42.53,1.7 41.7,1.7 41.2,2.2 41.2,3.68 38.68,6.2 34.83,6.2 32.85,8.18 v1(32.44,8.18)
  BOTTOM w0.102: v1(42.75,1.48) 42.03,1.48 R17.2
N209434: length 32.9
  TOP w0.102: U1.B15 20.25,11.77 22.37,13.89 28.18,13.89 31.66,10.41 31.66,9.24 32.12,8.78 32.48,8.78 v1(32.7,8.56)
  SIG2 w0.102: v1(42.75,2.13) 42.53,1.91 41.78,1.91 41.4,2.29 41.4,2.74 41.53,2.87 41.53,3 41.4,3.12 41.4,3.25 41.53,3.38 41.53,3.51 41.4,3.63 41.4,3.76 41.28,3.89 41.28,4.07 41.19,4.16 41.01,4.16 40.92,4.25 40.92,4.43 40.83,4.51 40.65,4.51 40.56,4.6 40.56,4.78 40.47,4.87 40.29,4.87 40.2,4.96 40.2,5.14 40.11,5.23 39.93,5.23 39.84,5.32 39.84,5.5 39.75,5.59 39.57,5.59 39.48,5.68 39.48,5.86 39.39,5.95 39.21,5.95 39.12,6.04 39.12,6.22 39.03,6.31 38.85,6.31 38.76,6.4 37.91,6.4 37.78,6.53 37.66,6.53 37.53,6.4 37.4,6.4 37.27,6.53 37.15,6.53 37.02,6.4 36.89,6.4 36.77,6.53 36.64,6.53 36.51,6.4 36.39,6.4 36.26,6.53 36.13,6.53 36,6.4 34.92,6.4 32.76,8.56 v1(32.7,8.56)
  BOTTOM w0.102: v1(42.75,2.13) 42.11,2.13 R18.2
N209454: length 26.1
  TOP w0.102: v1(30.98,8.64) 30.98,10.01 27.71,13.28 22.63,13.28 20.89,11.55 20.89,11.19 U1.E15
  BOTTOM w0.102: J2.9 35.56,3.14 35.22,3.48 34.62,3.48 34.37,3.23 33.4,3.23 31.37,5.26 31.37,8.25 v1(30.98,8.64)
N209458: length 26.1
  TOP w0.102: U1.D15 19.85,10.8 22.54,13.49 27.79,13.49 31.26,10.02 31.26,8.86 31.34,8.78 31.34,8.48 v1(30.99,8.13)
  BOTTOM w0.102: v1(30.99,8.13) 30.99,5.33 33.29,3.02 34.49,3.02 34.75,3.28 35.07,3.28 35.28,3.07 35.28,2.67 35.16,2.55 J2.11
N209478: length 38
  TOP w0.102: U1.D1 10.02,10.47 9.98,10.52 v1(9.96,10.52)
  SIG2 w0.102: v1(35.66,3.56) 35.46,3.76 34.69,3.76 31.57,6.88 31.57,10.07 26.12,15.52 12.35,15.52 10.34,13.51 10.34,13.19 9.32,12.17 9.32,10.82 9.63,10.52 v1(9.96,10.52)
  BOTTOM w0.102: v1(35.66,3.56) 35.56,3.66 J2.10
N209482: length 23.7
  TOP w0.102: v1(32.07,9.62) 31.87,9.82 31.87,10.49 28.26,14.1 22.28,14.1 20.28,12.1 19.2,12.1 U1.B14
  BOTTOM w0.102: J2.16 34.36,4.49 34.1,4.75 33.12,4.75 31.67,6.2 31.67,9.22 v1(32.07,9.62)
N209502: length 25.9
  TOP w0.102: U1.B13 18.55,12.1 18.55,12.6 19.04,13.09 20.18,13.09 20.23,13.04 20.94,13.04 22.2,14.3 28.38,14.3 32.22,10.46 v1(32.22,10.43)
  BOTTOM w0.102: v1(32.22,10.43) 32.39,10.43 32.69,10.14 32.69,9.42 32.08,8.81 32.08,6.37 33.27,5.18 34.59,5.18 35.16,4.62 J2.12
